# Altium PCB usbaxe.PcbDoc
Units mm, origin at the board's own origin, x right, y up, seen from the top; angles counter-clockwise.
Board outline 54 x 25 mm, 2 copper layers (Top Layer, Bottom Layer), stack 1.58 mm thick; 31 components, 51 nets, 212 pads, 35 vias.
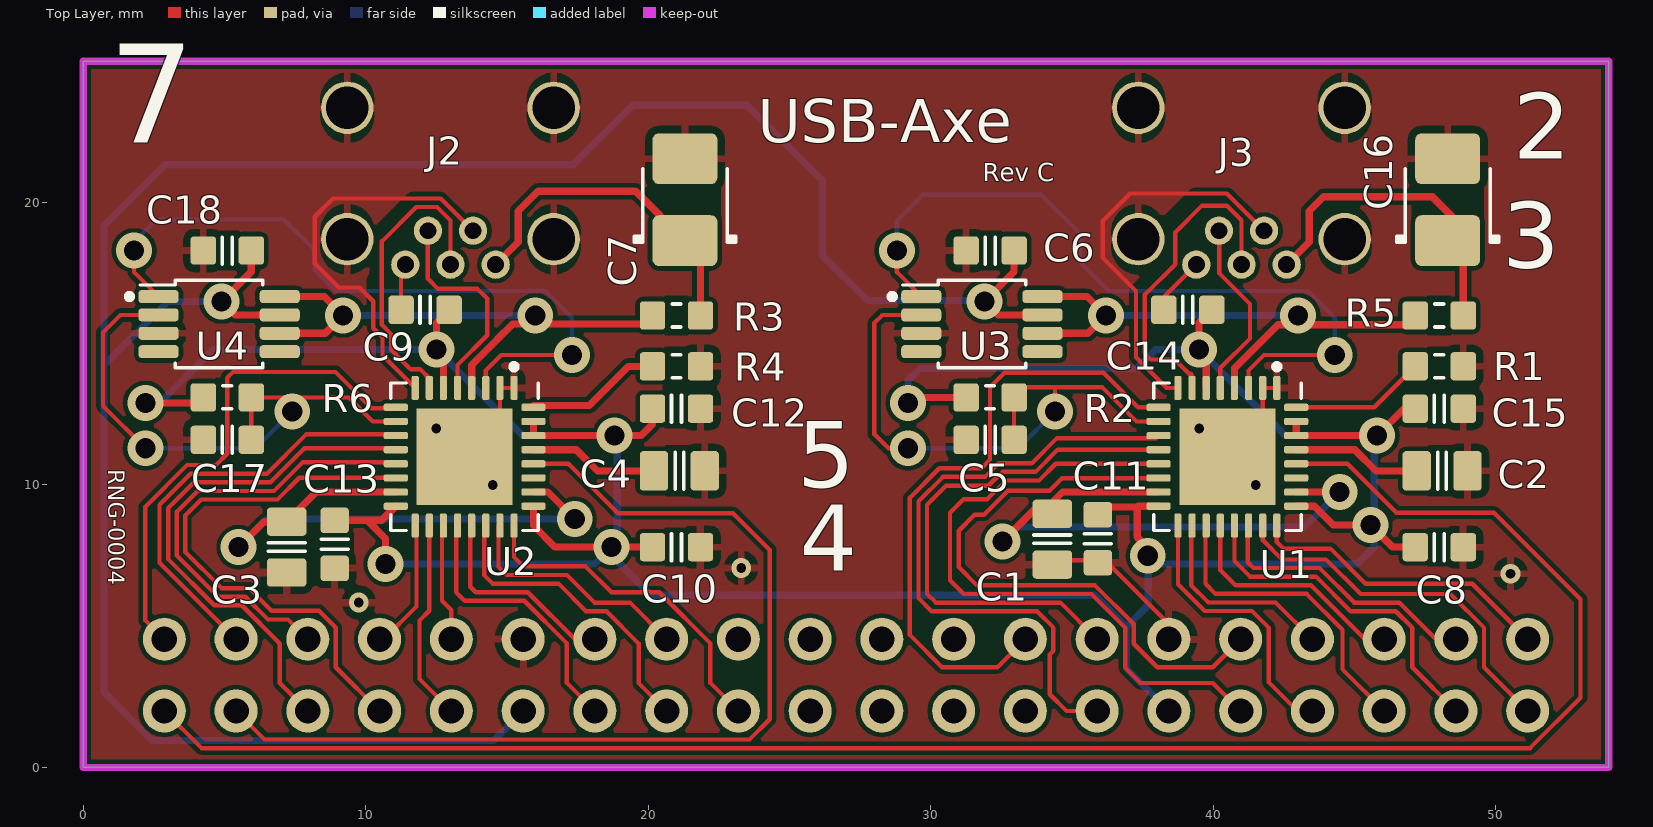
[diagram p0: Top Layer view]
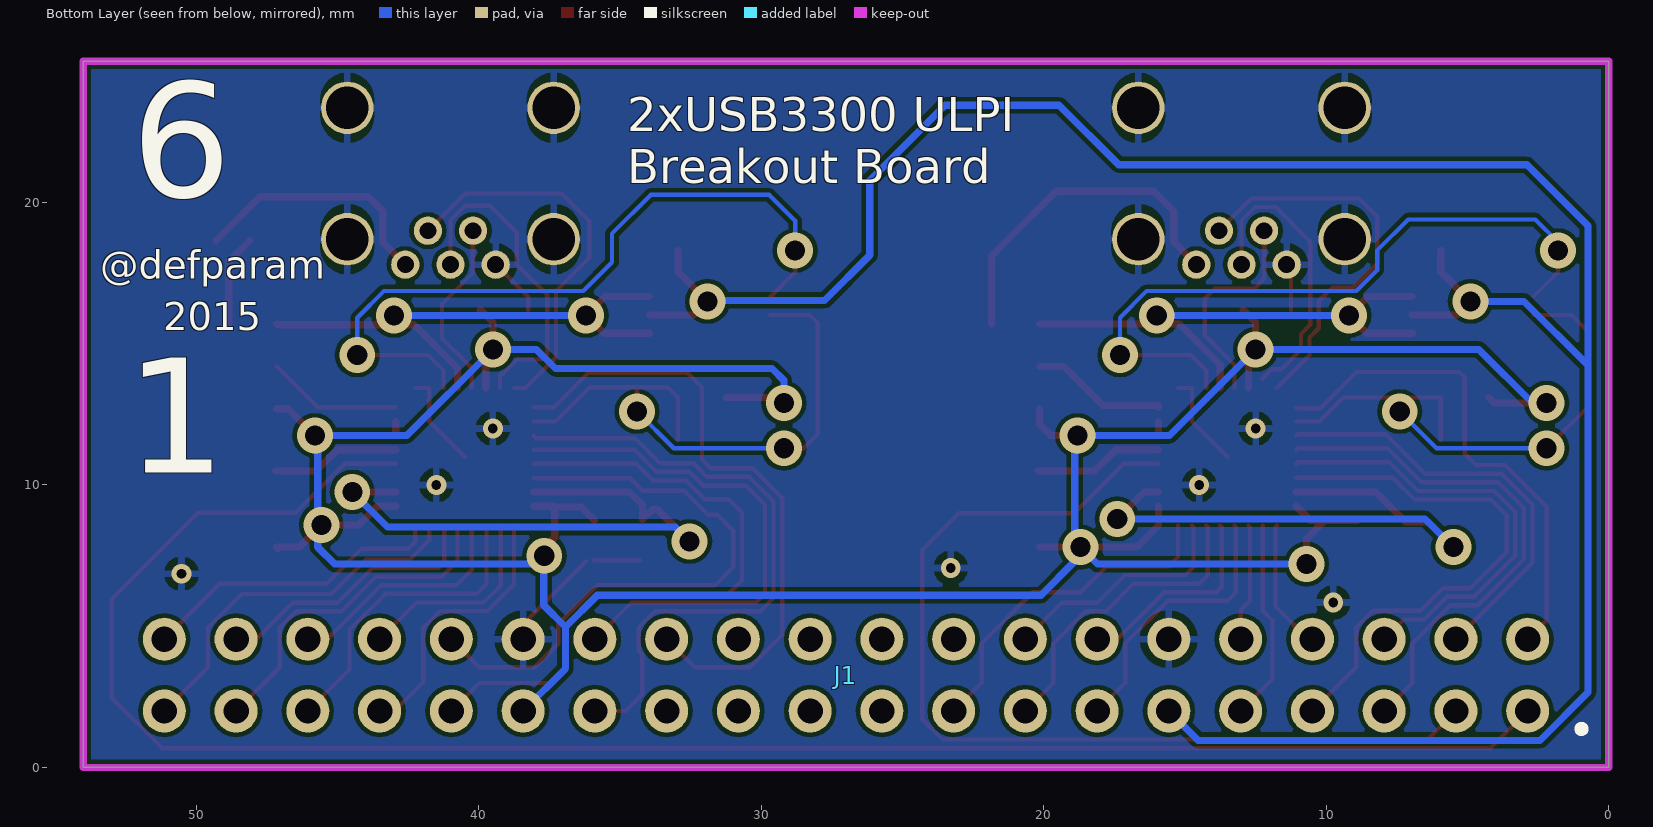
[diagram p1: Bottom Layer view, seen from below]
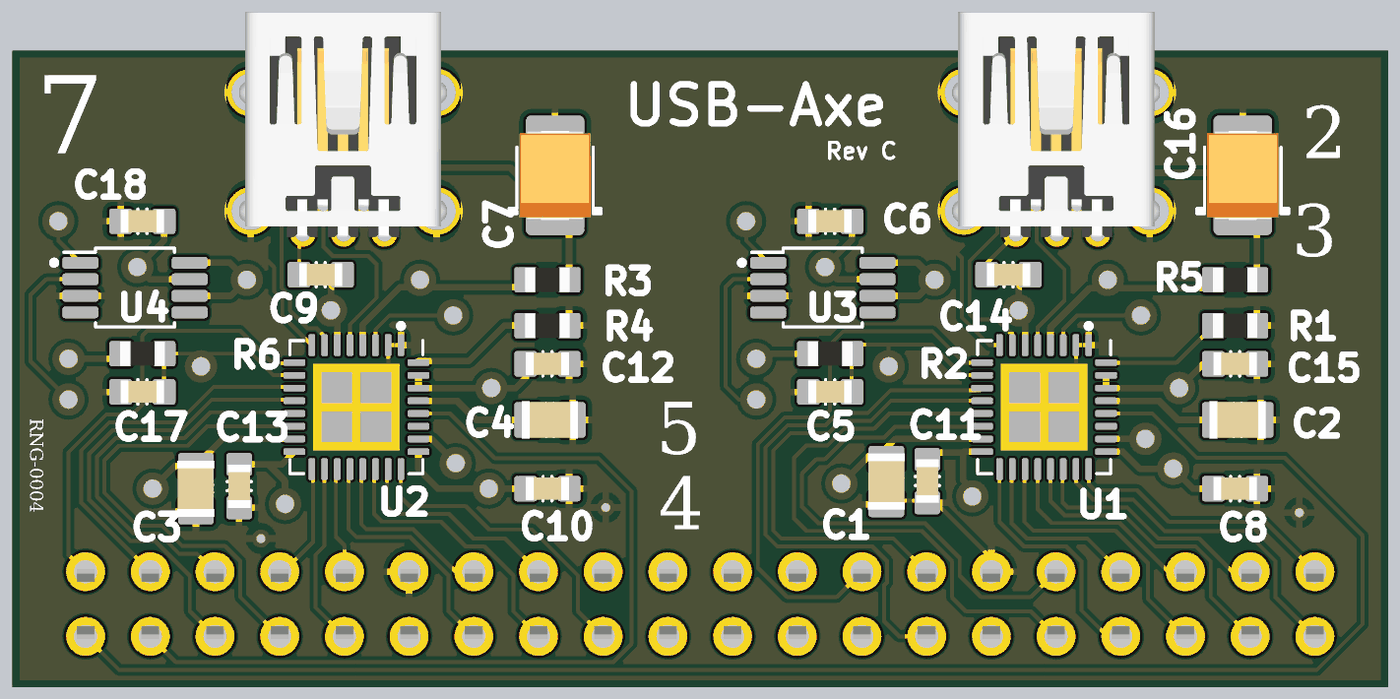
[diagram p2: 3D render of the assembled board from above, using the file's embedded part models]

## Layer stack, top to bottom
Top Solder: solder mask 0.0102, Solder Resist, Dk 3.5
Top Layer: signal copper 0.0356
Dielectric 1: dielectric 1.5086, FR-4, Dk 4.8
Bottom Layer: signal copper 0.0356
Bottom Solder: solder mask 0.0102, Solder Resist, Dk 3.5

## Board outline
0,0 0,25 54,25 54,0

## Design rules (kind name [scope] priority, off if disabled: settings)
Clearance [All] p1: gap=0.152
HoleSize [All] p1: absolutevalues=TRUE maxlimit=2.54 minlimit=0.33 maxpercent=80.000 minpercent=20.000
MinimumAnnularRing [All] p1: minimumring=0.178
PolygonConnect [All] p1: connectstyle=Relief reliefconductorwidth=0.254 reliefentries=4 polygonreliefangle="90 Angle" airgapwidth=0.254
RoomDefinition usbaxe [InComponentClass('usbaxe')] p1: confinementstyle=ConfineIn formatcopy=TRUE lockcomponents=FALSE outline -1.911,-3.779 55.651,-3.779 55.651,28.2 -1.911,28.2
RoutingVias [All] p1: holewidth=0.711 width=1.27 viastyle="Through Hole" minholewidth=0.711 minwidth=1.27 maxholewidth=0.711 maxwidth=1.27
SolderMaskExpansion [All] p1: expansion=0.102
Width [All] p1: maxlimit=0.254 minlimit=0.152 preferedwidth=0.254
29 further rules are at their usual default settings.

## Components (designator, comment, footprint, x,y, rotation, side; value= is the part's Value field where it differs from the comment)
C1 "approved sub OK" CAPC2012X135N 34.306,8.081 r90 top
C2 "approved sub OK" CAPC2012X135N 48.1,10.5 r180 top
C3 "approved sub OK" CAPC2012X135N 7.2,7.8 r90 top
C4 "approved sub OK" CAPC2012X135N 21.1,10.5 r180 top
C5 "approved sub OK" CAPC1608X90N 32.1,11.6 r180 top
C6 "approved sub OK" CAPC1608X90N 32.1,18.3 r180 top
C7 "Value" CAPMP3528X210N 21.3,20.1 r90 top
C8 "approved sub OK" CAPC1608X90N 48,7.8 r0 top
C9 "approved sub OK" CAPC1608X90N 12.1,16.2 r180 top
C10 "approved sub OK" CAPC1608X90N 21,7.8 r0 top
C11 "approved sub OK" CAPC1608X90N 35.916,8.097 r270 top
C12 "approved sub OK" CAPC1608X90N 21,12.7 r0 top
C13 "approved sub OK" CAPC1608X90N 8.9,7.9 r270 top
C14 "approved sub OK" CAPC1608X90N 39.1,16.2 r180 top
C15 "approved sub OK" CAPC1608X90N 48,12.7 r0 top
C16 "Value" CAPMP3528X210N 48.3,20.1 r90 top
C17 "approved sub OK" CAPC1608X90N 5.1,11.6 r180 top
C18 "approved sub OK" CAPC1608X90N 5.1,18.3 r180 top
J1 "2-215307-0" RCPT_40POS 2.87,2 r180 bottom locked
J2 "USB_Mini-B_TH" USB_MINI-B_WURTH-TH 13,17.8 r0 top locked
J3 "USB_Mini-B_TH" USB_MINI-B_WURTH-TH 41,17.8 r0 top locked
R1 "Thick Film" RESC1608X55N 48,14.2 r0 top
R2 "Thick Film" RESC1608X55N 32.1,13.1 r180 top
R3 "Thick Film" RESC1608X55N 21,16 r0 top
R4 "Thick Film" RESC1608X55N 21,14.2 r0 top
R5 "Thick Film" RESC1608X55N 48,16 r0 top
R6 "Thick Film" RESC1608X55N 5.1,13.1 r0 top
U1 "USB3300" USB3300_QFN32 43.675,14.175 r180 top locked
U2 "USB3300" USB3300_QFN32 16.675,14.175 r180 top locked
U3 "MIC2025/75" SOP65P490X102-8L30N 28,17.6 r270 top
U4 "MIC2025/75" SOP65P490X102-8L30N 1,17.6 r270 top

## Footprints (in the part's own frame and the unit in brackets; to place one, negate y for a bottom-side part, rotate by r counter-clockwise, add the part's x,y. Pads: shape width x height; smd on the part's side, far side on the other; paste and mask are expansions set on the pad)
CAPC1608X90N [mm] "Chip Capacitor, Body 1.6x0.8mm, EIA 0603, IPC Medium Density"
  round 0.254 on Mech15: 0(0,0)
  rrect25% 0.9x1 smd: 1(-0.85,0) 2(0.85,0)
  Top Layer pour cut-out: -0.6,0.5 -0.4,0.7 0.4,0.7 0.6,0.5 0.6,-0.5 0.4,-0.7 -0.4,-0.7 -0.6,-0.5
  silkscreen extent -0.18,-0.48 0.18,0.48, body extent -0.85,-0.45 0.85,0.45, height 0.89
CAPC2012X135N [mm] "Chip Capacitor, Body 2.0x1.2mm, EIA 0805, IPC Medium Density"
  round 0.254 on Mech15: 0(0,0)
  rrect25% 1x1.4 smd: 1(-0.9,0) 2(0.9,0)
  Top Layer pour cut-out: -0.675,0.7 -0.475,0.9 0.475,0.9 0.675,0.7 0.675,-0.7 0.475,-0.9 -0.475,-0.9 -0.675,-0.7
  silkscreen extent -0.15,-0.65 0.15,0.65, body extent -1.1,-0.72 1.1,0.73, height 1.34
CAPMP3528X210N [mm] "Molded body capacitor, Body 3.5x2.8mm, 1210, IPC Nominal settings"
  round 0.254 on Mech15: 0(0,0)
  rrect25% 1.8x2.3 smd: 1(-1.45,0) 2(1.45,0)
  Top Layer pour cut-out: -0.508,1.27 0.508,1.27 0.508,-1.27 -0.508,-1.27
  silkscreen extent -1.5,-1.8 1.1,1.8, body extent -1.75,-1.4 1.75,1.4, height 2.1
RCPT_40POS [mil] "CONN RCPT 40POS"
  round 60 hole 35.43: 1(0,0) 2(0,100) 3(-100,0) 4(-100,100) 5(-200,0) 6(-200,100) 7(-300,0) 8(-300,100) 9(-400,0) 10(-400,100) 11(-500,0) 12(-500,100) 13(-600,0) 14(-600,100) 15(-700,0) 16(-700,100) 17(-800,0) 18(-800,100) 19(-900,0) 20(-900,100) 21(-1000,0) 22(-1000,100) 23(-1100,0) 24(-1100,100) 25(-1200,0) 26(-1200,100) 27(-1300,0) 28(-1300,100) 29(-1400,0) 30(-1400,100) 31(-1500,0) 32(-1500,100) 33(-1600,0) 34(-1600,100) 35(-1700,0) 36(-1700,100) 37(-1800,0) 38(-1800,100) 39(-1900,0) 40(-1900,100)
  silkscreen extent 70,-30 80,-20, body extent -1950,-50 50,150, height 276
RESC1608X55N [mm] "Chip Resistor, Body 1.6x0.8mm, EIA 0603, IPC Medium Density"
  round 0.254 on Mech15: 0(0,0)
  rrect25% 0.9x1 smd: 1(-0.85,0) 2(0.85,0)
  Top Layer pour cut-out: -0.6,0.5 -0.4,0.7 0.4,0.7 0.6,0.5 0.6,-0.5 0.4,-0.7 -0.4,-0.7 -0.6,-0.5
  silkscreen extent -0.15,-0.41 0.15,0.41, body extent -0.87,-0.47 0.88,0.48, height 0.54
SOP65P490X102-8L30N [mm] "Small Outline Pkg (SOP), 0.65 mm pitch;8 pin,3.00 mm L X 3.00 mm W X 1.02 mm H body"
  rrect52% 0.46x1.42 smd: 1(0.93,1.665) 2(1.58,1.665) 3(2.23,1.665) 4(2.88,1.665) 5(2.88,5.955) 6(2.23,5.955) 7(1.58,5.955) 8(0.93,5.955)
  silkscreen extent 0.36,0.54 3.45,5.36, body extent 0.43,2.34 3.38,5.28, height 0.65
USB3300_QFN32 [mm]
  rrect54% 0.26x0.86 smd: 1(1.425,0.74) 2(1.925,0.74) 3(2.425,0.74) 4(2.925,0.74) 5(3.425,0.74) 6(3.925,0.74) 7(4.425,0.74) 8(4.925,0.74) 17(4.925,5.61) 18(4.425,5.61) 19(3.925,5.61) 20(3.425,5.61) 21(2.925,5.61) 22(2.425,5.61) 23(1.925,5.61) 24(1.425,5.61)
  rrect54% 0.86x0.26 smd: 9(5.61,1.425) 10(5.61,1.925) 11(5.61,2.425) 12(5.61,2.925) 13(5.61,3.425) 14(5.61,3.925) 15(5.61,4.425) 16(5.61,4.925) 25(0.74,4.925) 26(0.74,4.425) 27(0.74,3.925) 28(0.74,3.425) 29(0.74,2.925) 30(0.74,2.425) 31(0.74,1.925) 32(0.74,1.425)
  rect 3.4x3.4 smd paste-3.4 mask+0: 33(3.175,3.175)
  silkscreen extent 0.57,-0.11 5.78,5.78, body extent 0.63,0.64 5.72,5.72, height 0.65
USB_MINI-B_WURTH-TH [mm]
  round 1 hole 0.6: 1(1.6,0) 2(0.8,1.2) 3(0,0) 4(-0.8,1.2) 5(-1.6,0)
  round 1.856 hole 1.5 mask+0.102: 6(-3.65,0.9) 6(-3.65,5.55) 6(3.65,0.9) 6(3.65,5.55)
  body extent -4.1,-0.13 4.05,8.7, height 4.05

## Part data
C1 C2 C3 C4: library part CAPC_4u7_0805, "Capacitor SMD Cer 4.7uF 10% 16V X5R 0805"
C5 C6 C8 C9 C10 C11 C12 C13 C14 C15 C17 C18: library part CAPC_100n_0603_X7R_50V_10%, "Capacitor SMD Cer 100nF 10% 50V X7R 0603"
C7 C16: library part CAPT_100u_1210_10V, "Capacitor SMD Tantalum 100uF 20% 10V 1210"
J1: "CONN RCPT 40POS VERT T/H"
J2 J3: "Connector TH USB Type Mini-B"
R1 R4: library part RES_12K_0603_1%, "Resistor SMD chip 12k Ohm 0.1W 1% 0603"
R2 R6: library part RES_10K_0603_5%, "Resistor SMD chip 10k Ohm 0.1W 5% 0603"
R3 R5: library part RES_820R_0603_1%, "Resistor SMD chip 820 Ohm 0.1W 1% 0603"
U1 U2: "USB 2.0 ULPI PHY"

## Via types
v1: diameter 1.27, hole 0.711, Top Layer to Bottom Layer, tented both sides, 28 vias
v2: diameter 0.7, hole 0.34, Top Layer to Bottom Layer, tented both sides, 7 vias

## Nets (pads, with @x,y where several pads share a name; then routed paths per layer and width w, separated by ;. In a path a pad name is that pad's centre, name@x,y a point inside that pad or via, vN(x,y) a via of type N, cw(c..) or ccw(c..) an arc to the next point about the centre after c; other vN are vias at no path point)
FLG_A: C17.1 R6.2 U2.10 U4.2 | length 20.1
  Top Layer w0.152: v1(2.2,11.3) 0.7,12.8 0.7,15.4 1.32,16.02 U4.2 ; C17.1 R6.2 v1@7.4,13.1 ; v1(7.4,12.6) v1@7.4,13.1 ; U2.10 10.25,12.25 9.4,13.1 v1@7.4,13.1
  Bottom Layer w0.152: v1(2.2,11.3) 6.1,11.3 v1(7.4,12.6)
FLG_B: C5.1 R2.1 U1.10 U3.2 | length 21
  Top Layer w0.152: v1(29.2,11.3) 28.502,11.3 28.001,11.8 28.001,15.733 28.288,16.02 U3.2 ; C5.1 R2.1 33.314,13.464 34.417,13.464 ; v1(34.4,12.6) 34.4,13.447 34.417,13.464 ; U1.10 37.28,12.25 36.066,13.464 34.417,13.464
  Bottom Layer w0.152: v1(29.2,11.3) 33.1,11.3 v1(34.4,12.6)
GND: C1.1 C2.1 C3.1 C4.1 C5.2 C6.2 C7.2 C8.2 C9.2 C10.2 C11.2 C12.2 C13.2 C14.2 C15.2 C16.2 C17.2 C18.2 J1.12 J1.30 J2.5 J2.6 J3.5 J3.6 R1.2 R4.2 U1.1 U1.2 U1.33 U2.1 U2.2 U2.33 U3.3 U4.3 | length 15.8
  Top Layer w0.152: C9.2 11.25,17.65 J2.5 ; U2.33 14.75,12.25 U2.2 U2.1 ; C1.1@34.29,7.331 C11.2@35.92,7.331 ; C11.2@36.196,7.305 J1.30@38.716,4.785 ; C14.2 38.25,16.65 J3.5 ; U1.33 41.75,12.25 U1.2 U1.1
  other v2: 9.754,5.842 50.521,6.858 23.292,7.061 14.5,10 41.5,10 12.5,12 39.5,12
NetC1_2: C1.2 U1.15 U1.26 | length 20.8
  Top Layer w0.254: v1@32.639,8.381 32.917,8.381 33.679,9.143 33.837,9.143 34.2,8.78 34.2,9.29 34.66,9.75 U1.15 ; U1.26 44.472,9.75 v1(44.475,9.754)
  Bottom Layer w0.254: v1(32.537,8.001) 33.045,8.509 43.231,8.509 v1(44.475,9.754)
NetC2_2: C2.2 U1.29 | length 4.6
  Top Layer w0.254: U1.29 45.007,11.25 45.757,10.5 C2.2
NetC3_2: C3.2 U2.15 U2.26 | length 20.5
  Top Layer w0.254: v1(5.5,7.8) 6.4,8.7 C3.2 8.25,9.75 U2.15 ; U2.26 16.45,9.75 v1(17.4,8.8)
  Bottom Layer w0.254: v1(5.5,7.8) 6.5,8.8 v1(17.4,8.8)
NetC4_2: C4.2 U2.29 | length 4.6
  Top Layer w0.254: U2.29 17.45,11.25 18.2,10.5 C4.2
NetC7_1: C7.1 J2.1 R3.2 | length 12.3
  Top Layer w0.254: J2.1 15.4,18.6 15.4,19.7 16.096,20.396 19.554,20.396 C7.1 21.85,18.1 R3.2@21.85,15.7
NetC16_1: C16.1 J3.1 R5.2 | length 12.2
  Top Layer w0.254: J3.1 43.4,18.6 43.4,19.7 43.9,20.2 47.75,20.2 C16.1@49.3,18.65 ; C16.1@48.1,18.65 48.85,17.9 R5.2@48.85,15.7
NetJ1_1: J1.1 U1.28 | length 66.9
  Top Layer w0.152: J1.1 4.184,0.686 51.217,0.686 53,2.469 53,5.953 49.936,9.017 46.483,9.017 44.75,10.75 U1.28
NetJ1_2: J1.2 U2.9 | length 17.9
  Top Layer w0.152: J1.2@2.86,4.54 2.2,5.2 2.2,9.231 3.674,10.705 4.7,10.705 5.1,11.105 5.1,13.8 5.3,14 8.931,14 10.216,12.716 11.031,12.716 U2.9
NetJ1_3: J1.3 U2.28 | length 35.2
  Top Layer w0.152: J1.3 6.419,0.991 23.582,0.991 24.3,1.709 24.3,7.7 23,9 18.927,9 17.177,10.75 U2.28
NetJ1_4: J1.4 U2.11 | length 15.3
  Top Layer w0.152: J1.4 2.7,7.25 2.7,9.3 3.8,10.4 6.5,10.4 7.9,11.8 11.015,11.8 U2.11
NetJ1_5: J1.5 U2.12 | length 18.8
  Top Layer w0.152: J1.5 6.959,2.991 6.959,4.392 5.61,5.741 4.641,5.741 3.005,7.376 3.005,9.174 3.926,10.095 6.626,10.095 7.831,11.3 11.015,11.3 U2.12
NetJ1_6: J1.6 U2.13 | length 15.9
  Top Layer w0.152: J1.6 7.249,5.241 6.541,5.241 5.737,6.045 4.767,6.045 3.31,7.502 3.31,9.047 4.053,9.79 6.753,9.79 7.762,10.8 11.015,10.8 U2.13
NetJ1_7: J1.7 U2.14 | length 19.3
  Top Layer w0.152: J1.7 8.941,3.549 8.941,4.95 8.345,5.546 6.667,5.546 5.863,6.35 4.893,6.35 3.614,7.629 3.614,8.921 4.179,9.486 6.879,9.486 7.647,10.253 11.062,10.253 U2.14
NetJ1_8: J1.8 U2.17 | length 4.7
  Top Layer w0.152: J1.8 10.64,4.54 11.8,5.7 11.8,8.515 U2.17
NetJ1_9: J1.9 U2.18 | length 7.2
  Top Layer w0.152: U2.18 12.25,5.55 11.9,5.2 11.9,3.13 J1.9
NetJ1_10: J1.10 U2.19 | length 4.2
  Top Layer w0.152: U2.19 12.7,8.515 12.7,5.9 13.03,5.57 J1.10
NetJ1_13: J1.13 U2.20 | length 9.9
  Top Layer w0.152: U2.20 13.2,8.515 13.2,6.2 13.5,5.9 15.611,5.9 17.119,4.392 17.119,2.991 J1.13
NetJ1_14: J1.14 U2.21 | length 7.4
  Top Layer w0.152: U2.21 13.7,8.515 13.7,6.4 13.895,6.205 15.737,6.205 17.402,4.54 J1.14
NetJ1_15: J1.15 U2.22 | length 11
  Top Layer w0.152: U2.22 14.2,8.515 14.2,6.8 14.49,6.51 16.821,6.51 17.8,5.531 18.52,5.531 19.659,4.392 19.659,2.991 J1.15
NetJ1_16: J1.16 U2.23 | length 8.5
  Top Layer w0.152: U2.23 14.7,8.515 14.7,7.1 14.986,6.814 17.121,6.814 18.1,5.835 19.355,5.835 J1.16
NetJ1_17: J1.17 U2.24 | length 12.1
  Top Layer w0.152: U2.24 15.25,7.45 15.581,7.119 17.781,7.119 18.7,6.2 20.391,6.2 22.199,4.392 22.199,2.991 J1.17
NetJ1_26: J1.26 U1.9 | length 22.5
  Top Layer w0.152: J1.26 32.359,3.549 30.4,3.549 29.261,4.688 29.261,9.55 30.302,10.592 31.792,10.592 32.1,10.9 32.1,13.457 32.613,13.97 36.119,13.97 37.339,12.75 U1.9
NetJ1_27: J1.27 U1.11 | length 22.4
  Top Layer w0.152: J1.27 34.805,2 34.214,2.591 34.214,4.003 34.341,4.13 34.341,4.95 33.76,5.531 30.029,5.531 29.566,5.994 29.566,9.424 30.428,10.287 31.918,10.287 32.401,10.77 33.579,10.77 34.468,11.659 37.974,11.659 U1.11
NetJ1_28: J1.28 U1.12 | length 18.8
  Top Layer w0.152: J1.28 34.595,5.835 30.182,5.835 29.87,6.147 29.87,9.298 30.543,9.97 32.032,9.97 32.298,10.236 32.309,10.236 32.537,10.465 33.705,10.465 34.49,11.25 U1.12
NetJ1_31: J1.31 U1.13 | length 23.5
  Top Layer w0.152: U1.13 34.421,10.75 33.831,10.16 32.664,10.16 32.003,9.5 31.166,9.5 30.683,9.017 30.683,6.629 31.171,6.142 35.689,6.142 36.881,4.95 36.881,3.537 37.427,2.991 39.979,2.991 J1.31
NetJ1_32: J1.32 U1.14 | length 21.4
  Top Layer w0.152: U1.14 38.052,10.237 34.645,10.237 34.204,9.796 32.731,9.796 31.881,8.947 31.553,8.947 30.988,8.382 30.988,7.1 31.642,6.446 35.815,6.446 37.185,5.077 37.185,4.384 38.02,3.549 39.979,3.549 J1.32
NetJ1_33: J1.33 U1.17 | length 9.8
  Top Layer w0.152: U1.17 38.75,6.487 39.7,5.537 41.374,5.537 41.961,4.95 41.961,3.023 42.983,2 J1.33
NetJ1_34: J1.34 U1.18 | length 7.2
  Top Layer w0.152: U1.18 39.217,8.532 39.217,6.451 39.826,5.842 42.208,5.842 J1.34
NetJ1_35: J1.35 U1.19 | length 11.1
  Top Layer w0.152: U1.19 39.726,8.541 39.726,6.502 40.081,6.147 43.304,6.147 44.577,4.874 44.577,3.473 J1.35
NetJ1_36: J1.36 U1.20 | length 8.4
  Top Layer w0.152: U1.20 40.25,6.994 40.792,6.452 43.459,6.452 45.371,4.54 J1.36
NetJ1_37: J1.37 U1.21 | length 12.1
  Top Layer w0.152: U1.21 40.75,7.307 41.3,6.756 43.637,6.756 44.863,5.531 46.46,5.531 47.041,4.95 47.041,3.549 J1.37
NetJ1_38: J1.38 U1.22 | length 9.8
  Top Layer w0.152: U1.22 41.224,8.539 41.224,7.264 41.427,7.061 43.764,7.061 44.99,5.835 46.587,5.835 47.882,4.54 J1.38
NetJ1_39: J1.39 U1.23 | length 13.2
  Top Layer w0.152: U1.23 41.75,8.048 42.432,7.366 43.993,7.366 45.219,6.14 48.391,6.14 49.581,4.95 49.581,3.549 J1.39
NetJ1_40: J1.40 U1.24 | length 10.9
  Top Layer w0.152: U1.24 42.25,7.979 42.482,7.747 44.145,7.747 45.39,6.502 49.168,6.502 J1.40
NetJ2_2: J2.2 U2.8 | length 14.3
  Top Layer w0.152: U2.8 10.592,14.593 10.592,15.22 10.267,15.545 10.267,16.505 9.779,16.993 9.042,16.993 8.194,17.841 8.194,19.497 8.839,20.142 12.658,20.142 J2.2
NetJ2_3: J2.3 U2.7 | length 10.5
  Top Layer w0.152: U2.7@12.264,13.764 11.934,14.094 11.591,14.094 10.897,14.788 10.897,15.346 10.571,15.671 10.571,18.624 11.785,19.837 12.522,19.837 13,19.36 J2.3
NetJ2_4: J2.4 U2.5 | length 7.7
  Top Layer w0.152: J2.4 12.2,17.3 12.558,16.942 13.958,16.942 14.3,16.6 14.3,15.3 13.25,14.25 U2.5
NetJ3_2: J3.2 U1.8 | length 13.9
  Top Layer w0.152: U1.8 38.356,13.435 37.267,14.524 37.267,16.867 36.093,18.04 36.093,19.355 37.059,20.32 40.48,20.32 J3.2
NetJ3_3: J3.3 U1.7 | length 11.7
  Top Layer w0.152: U1.7 39.25,13.89 39.203,13.936 39.142,13.936 38.639,14.44 37.782,14.44 37.571,14.65 37.571,15.671 37.571,16.729 38.659,17.816 38.659,18.945 39.602,19.888 40.481,19.888 41,19.369 J3.3
NetJ3_4: J3.4 U1.5 | length 6.5
  Top Layer w0.152: J3.4 40.208,18.992 40.208,17.501 41.302,16.407 41.302,15.188 40.25,14.136 U1.5
NetR1_1: R1.1 U1.32 | length 4.8
  Top Layer w0.152: U1.32 45.7,12.75 R1.1
NetR3_1: R3.1 U2.4 U4.6 U4.8 | length 19.9
  Top Layer w0.254: U4.6 8.57,15.37 v1(9.2,16) 8.53,16.67 U4.8 ; U2.4 13.75,14.247 14.656,15.153 14.656,15.156 15.2,15.7 v1@16,15.7 ; v1(16,16) v1@16,15.7 ; R3.1@20.15,15.7 v1@16,15.7
  Bottom Layer w0.254: v1(9.2,16) v1(16,16)
NetR4_1: R4.1 U2.32 | length 4.9
  Top Layer w0.254: U2.32 15.935,12.814 17.914,12.814 19.3,14.2 R4.1
NetR5_1: R5.1 U1.4 U3.6 U3.8 | length 19.9
  Top Layer w0.254: U3.6 35.57,15.37 v1(36.2,16) 35.53,16.67 U3.8 ; U1.4 40.75,14.134 42.288,15.672 v1@42.977,15.672 ; v1(43,16) 43,15.695 v1@42.977,15.672 ; R5.1@47.15,15.7 47.122,15.672 v1@42.977,15.672
  Bottom Layer w0.254: v1(36.2,16) v1(43,16)
VBUSEN_A: U2.3 U4.1 | length 25.2
  Top Layer w0.152: v1(1.8,18.3) 1.8,17.535 U4.1 ; U2.3 14.25,14.05 14.8,14.6 v1(17.3,14.6)
  Bottom Layer w0.152: v1(1.8,18.3) 1.8,18.6 2.6,19.4 7.1,19.4 8.2,18.3 8.2,17.6 8.936,16.864 16.358,16.864 17.3,15.921 v1(17.3,14.6)
VBUSEN_B: U1.3 U3.1 | length 26.5
  Top Layer w0.152: v1(28.8,18.3) 28.8,17.535 U3.1 ; U1.3 41.25,14.054 41.796,14.6 v1(44.3,14.6)
  Bottom Layer w0.152: v1(28.8,18.3) 28.8,19.351 29.718,20.269 33.909,20.269 35.281,18.898 35.281,17.882 36.299,16.864 43.358,16.864 44.3,15.921 v1(44.3,14.6)
VCC3.3: C8.1 C9.1 C10.1 C11.1 C12.1 C13.1 C14.1 C15.1 J1.29 R2.2 R6.1 U1.6 U1.16 U1.25 U1.30 U1.31 U2.6 U2.16 U2.25 U2.30 U2.31 | length 127.4
  Top Layer w0.254: v1(2.2,12.9) 4.05,12.9 R6.1 ; C13.1 10.05,8.75 ; v1(10.7,7.2) 10.7,8.1 10.05,8.75 ; U2.16 10.565,8.75 10.05,8.75 ; U2.6 12.75,14.55 v1(12.5,14.8) 12.5,15.75 C9.1 ; U2.25 15.935,8.565 16.7,7.8 v1(18.7,7.8) C10.1 ; U2.31 U2.30 v1(18.8,11.75) 19.75,11.75 20.15,12.15 C12.1 ; v1(29.2,12.9) 29.4,13.1 R2.2 ; C11.1@35.9,8.75 36.366,9.216 37.313,9.216 ; 37.313,8.75 37.313,9.216 ; v1(37.68,7.494) 37.68,7.786 37.313,8.153 37.313,9.216 ; U1.16 37.346,9.25 37.313,9.216 ; U1.6 39.75,14.55 v1(39.5,14.8) 39.5,15.75 C14.1 ; U1.25 43.582,9.25 44.247,8.585 v1(45.568,8.585) 46.353,7.8 C8.1 C8.1@47.097,7.747 ; U1.31 U1.30 v1(45.8,11.75) 46.75,12.7 C15.1
  Bottom Layer w0.254: v1(2.2,12.9) 2.7,12.9 4.6,14.8 v1(12.5,14.8) 15.55,11.75 v1(18.8,11.75) ; v1(10.7,7.2) 18.1,7.2 v1(18.7,7.8) ; v1@18.9,7.3 20.1,6.1 35.803,6.1 36.931,4.971 ; v1@18.9,7.8 v1@18.9,11.9 ; v1(29.2,12.9) 29.2,13.706 29.616,14.122 37.287,14.122 37.965,14.8 v1(39.5,14.8) 42.55,11.75 v1(45.8,11.75) 45.7,11.65 45.7,7.8 45.1,7.2 37.7,7.2 37.7,5.74 36.931,4.971 ; J1.29 36.931,3.499 36.931,4.971
VCC5: C6.1 C18.1 J1.11 U3.7 U4.7 | length 83.2
  Top Layer w0.254: v1(4.9,16.5) 5.95,17.55 C18.1 ; 5.38,16.02 U4.7 ; C6.1 32.95,17.55 v1(31.9,16.5) 32.38,16.02 U3.7
  Bottom Layer w0.254: v1(4.9,16.5) 3,16.5 0.737,14.237 ; J1.11 14.529,0.959 2.439,0.959 0.737,2.661 0.737,14.237 ; v1@31.9,16.535 27.762,16.535 26.162,18.136 26.162,20.777 23.495,23.444 19.456,23.444 17.348,21.336 2.896,21.336 0.737,19.177 0.737,14.237
pads on no net: C1.0 C2.0 C3.0 C4.0 C5.0 C6.0 C7.0 C8.0 C9.0 C10.0 C11.0 C12.0 C13.0 C14.0 C15.0 C16.0 C17.0 C18.0 J1.18 J1.19 J1.20 J1.21 J1.22 J1.23 J1.24 J1.25 R1.0 R2.0 R3.0 R4.0 R5.0 R6.0 U1.27 U2.27 U3.4 U3.5 U4.4 U4.5

## Polygon pours and split planes (outlines as drawn)
GND on Top Layer "Top Layer-No Net" (solid, pour order 4): 0,0 0,25 54,25 54,0
GND on Bottom Layer "Top Layer-No Net1" (solid, pour order 6): 0,0 0,25 54,25 54,0

## Keep-outs
Keep-Out Layer:
  the board outline again, w0.254

## Silkscreen, mask and mechanical layers (free items; w line width, h text height)
Top Overlay:
  text "USB-Axe" at 23.869,22.136 h1.52
  text "7" at 0.91,20.964 h6
  text "2" at 50.621,20.784 h4
  text "Rev C" at 31.848,20.759 h0.64
  text "3" at 50.228,16.928 h4
  text "RNG-0004" at 0.697,10.56 h1 r270
  text "5" at 25.267,9.166 h4
  text "4" at 25.355,6.211 h4
Bottom Overlay:
  text "2xUSB3300 ULPI" at 34.736,22.528 h1.2
  text "Breakout Board" at 34.736,20.674 h1.2
  text "6" at 52.294,18.838 h7
  text "@defparam" at 53.39,17.308 h1
  text "2015" at 51.176,15.472 h1
  text "1" at 52.491,9.082 h7